# Altium PCB PCB.PcbDoc (part 1 of 2)
Units mm, origin at the board's own origin, x right, y up, seen from the top; angles counter-clockwise.
Board outline 59.56 x 122.05 mm, 4 copper layers (Top Layer, GND, POWER, Bottom Layer), stack 0.778 mm thick; 182 components, 168 nets, 567 pads, 302 vias.
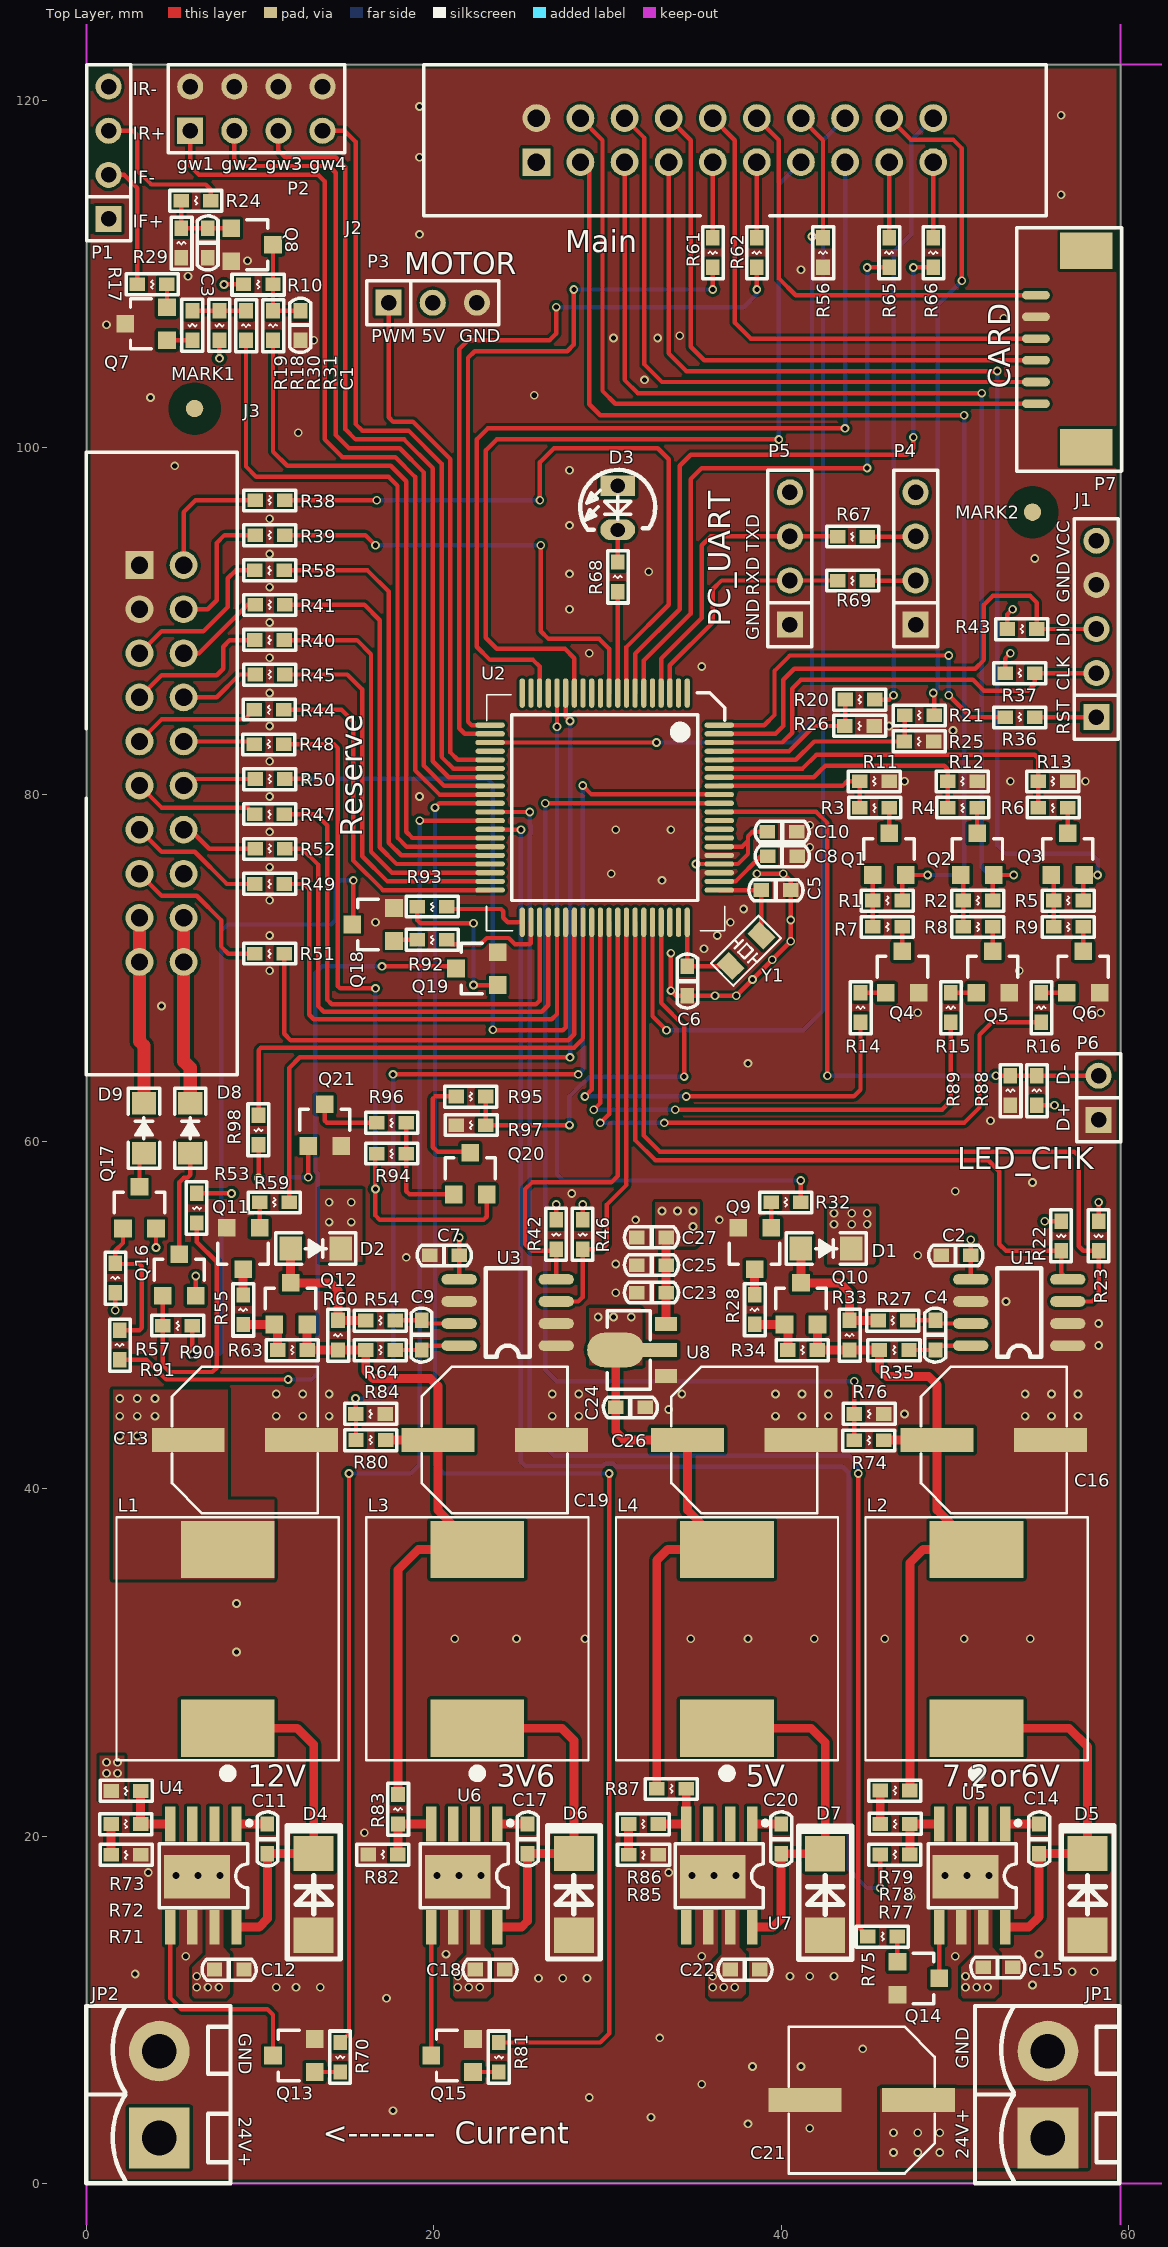
[diagram p0: Top Layer view]
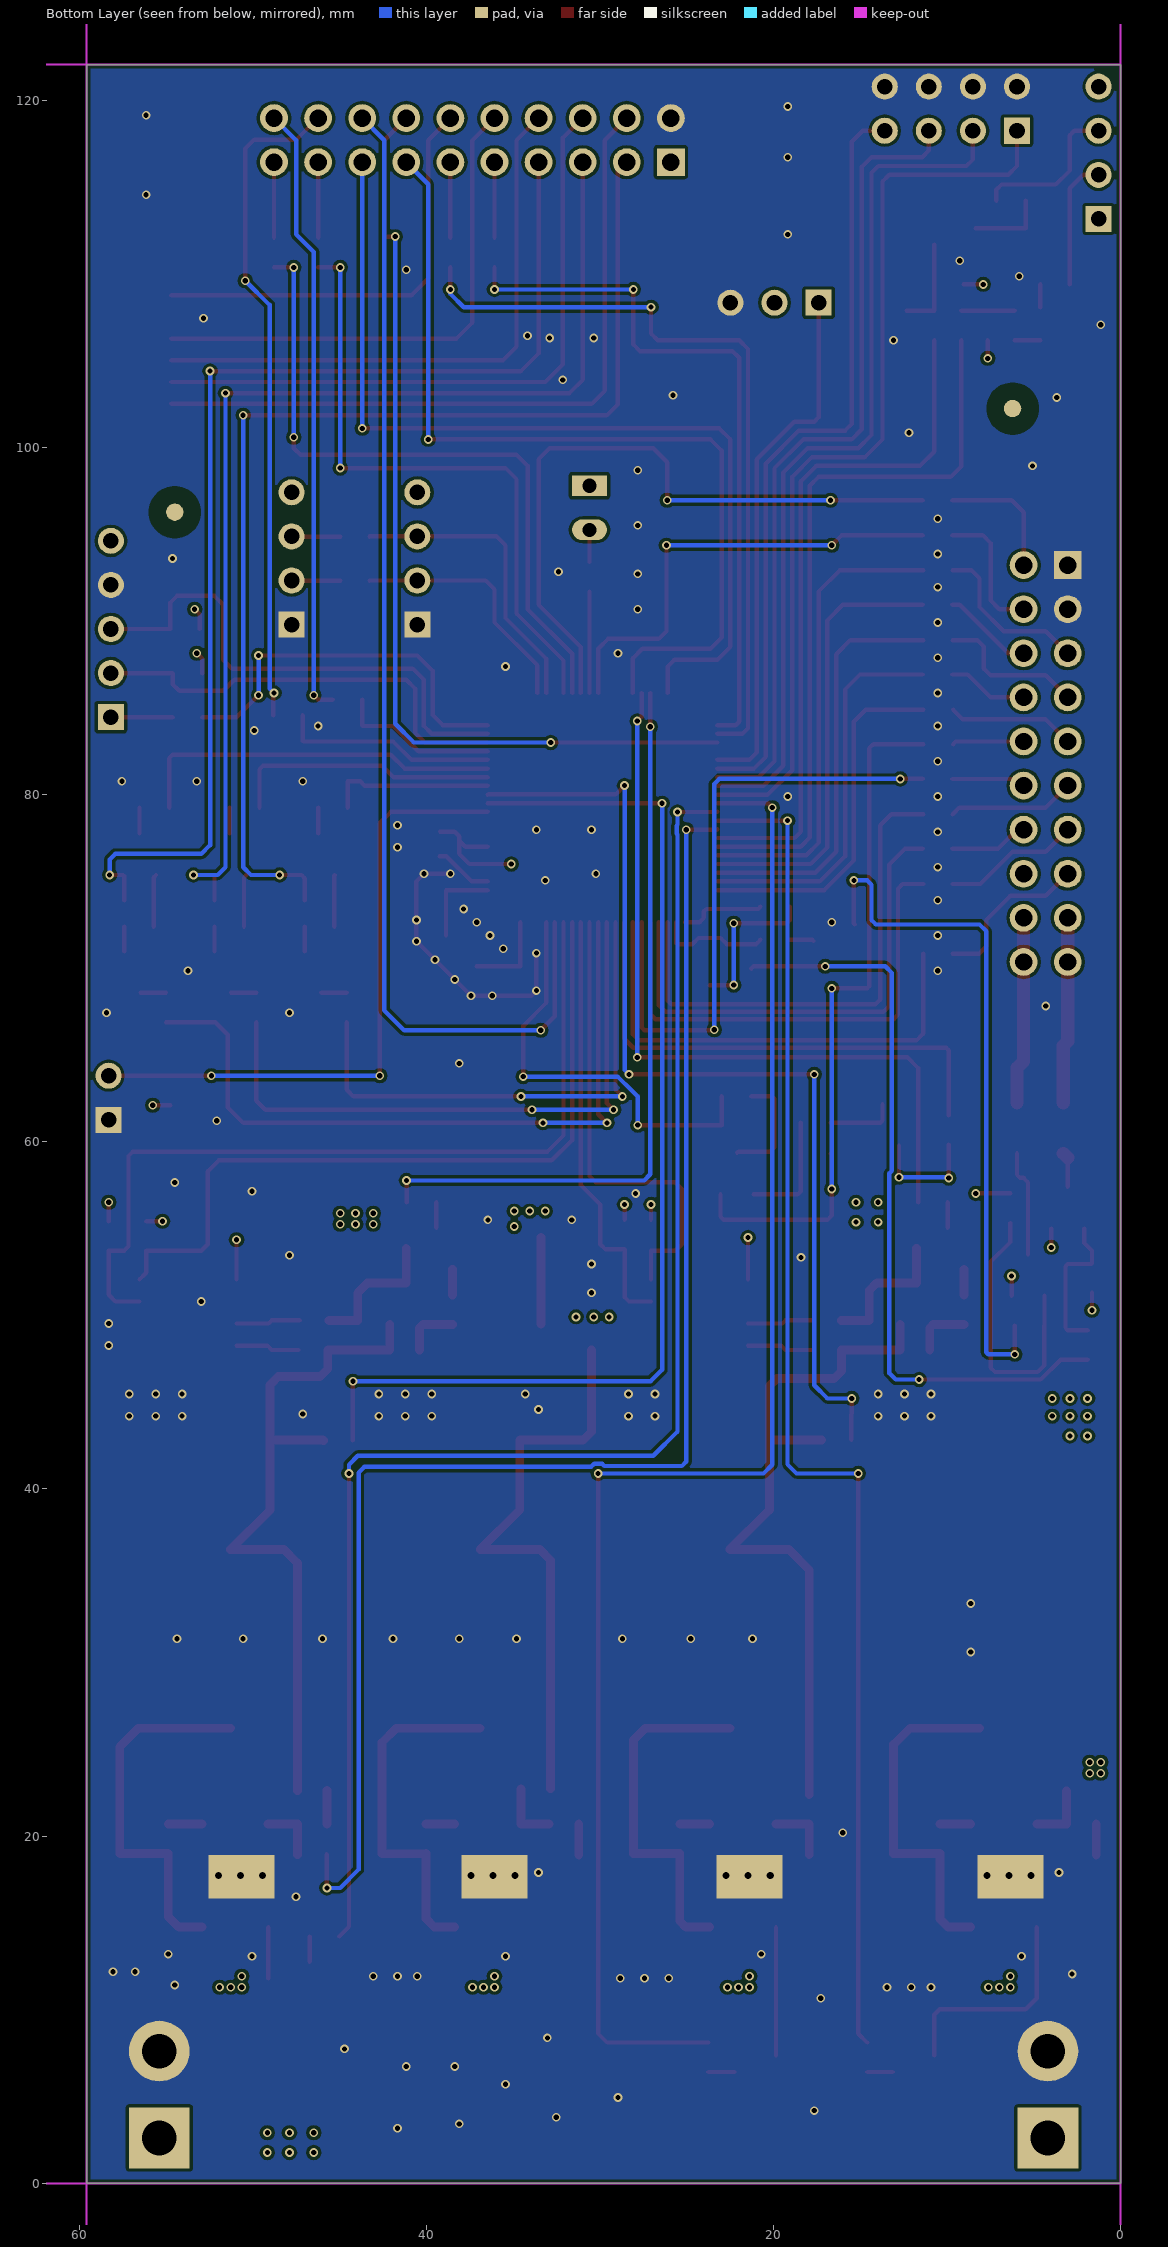
[diagram p1: Bottom Layer view, seen from below]
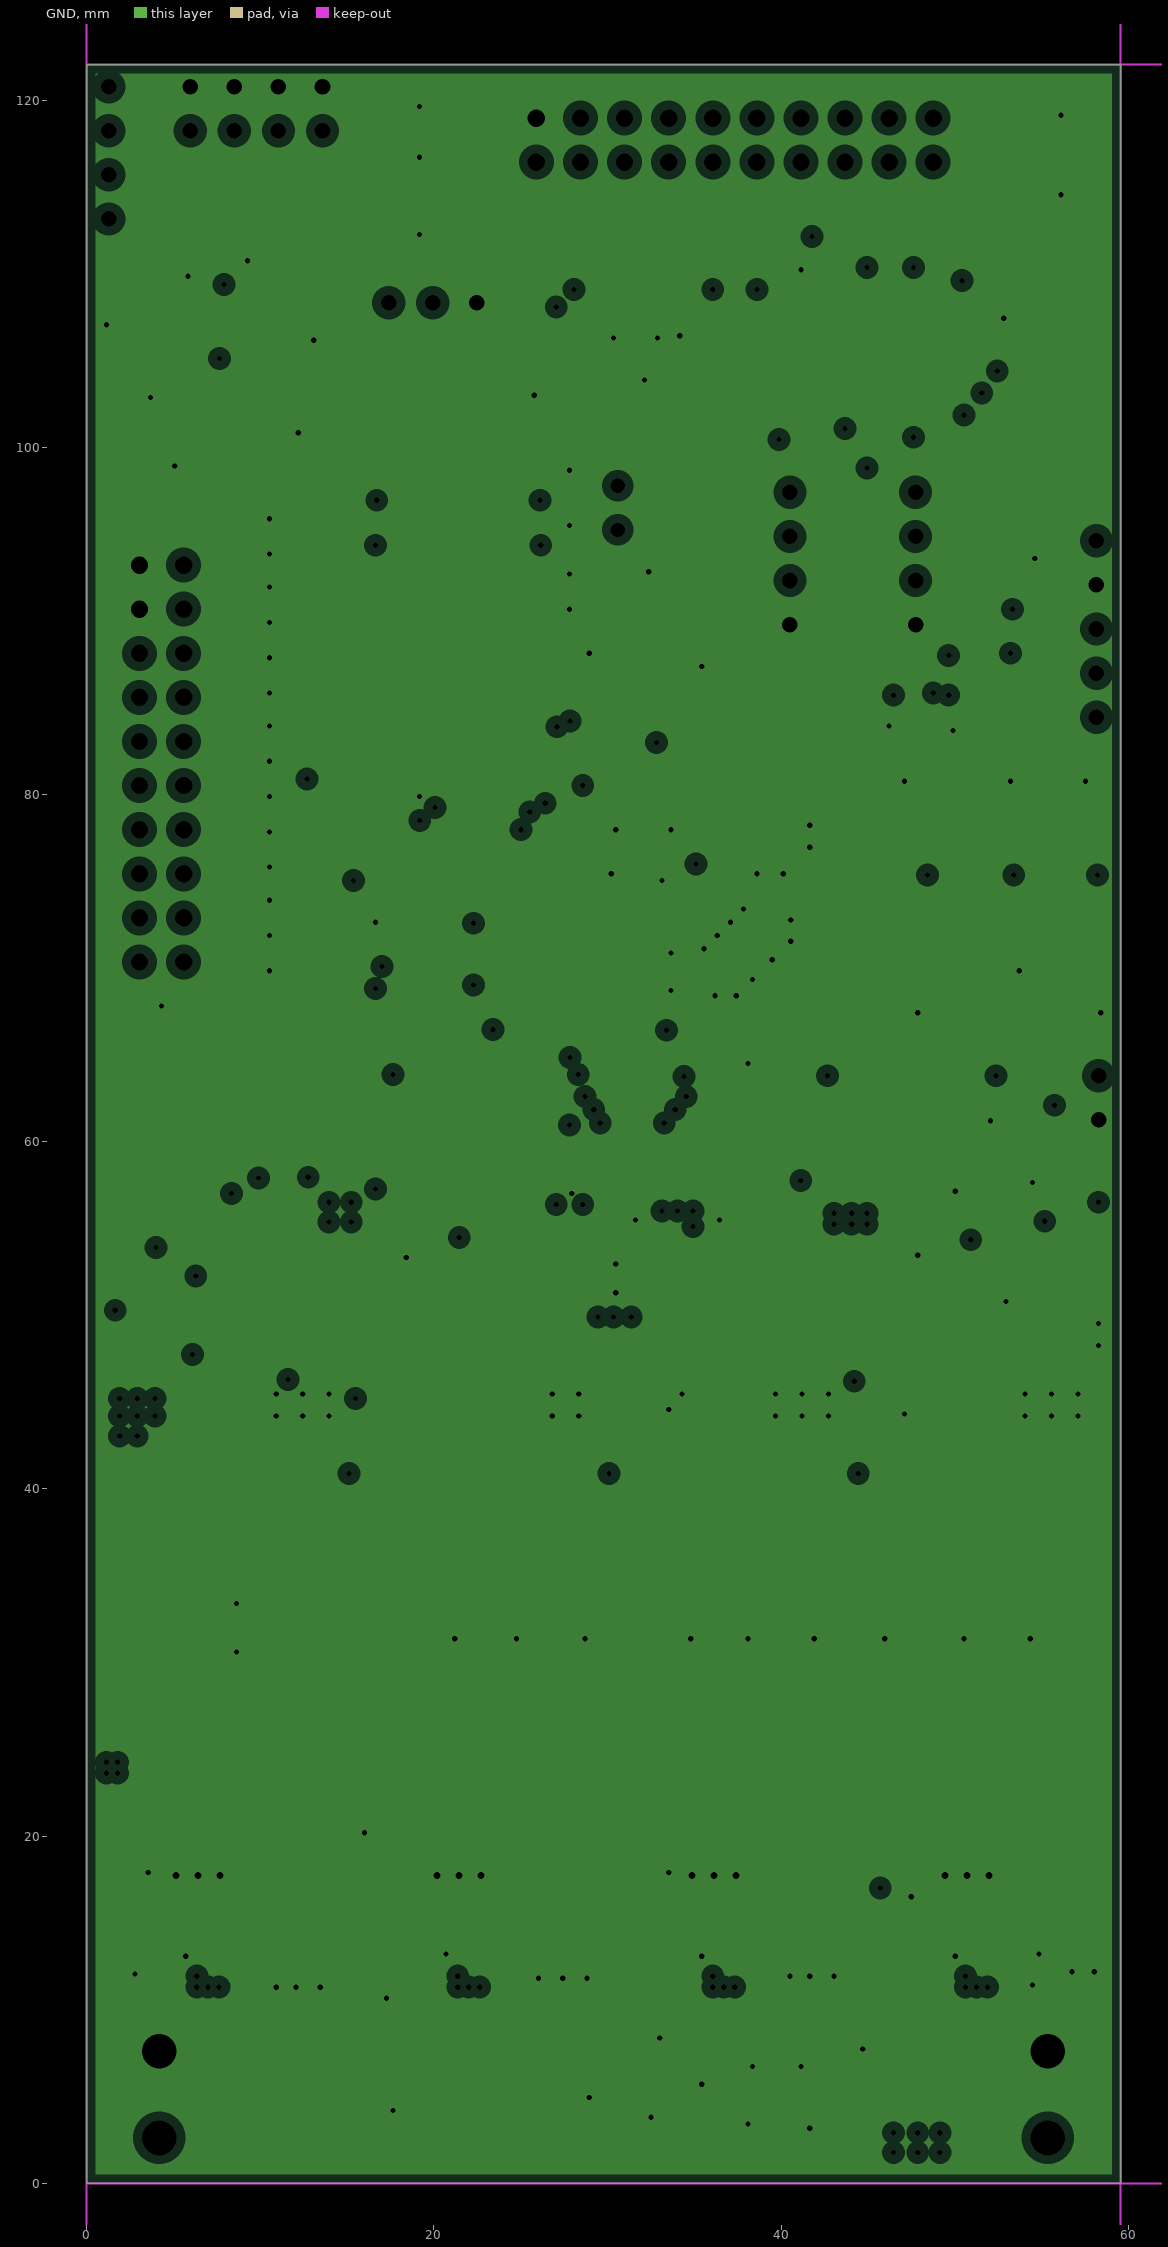
[diagram p2: GND, clearances drawn from the general rule]
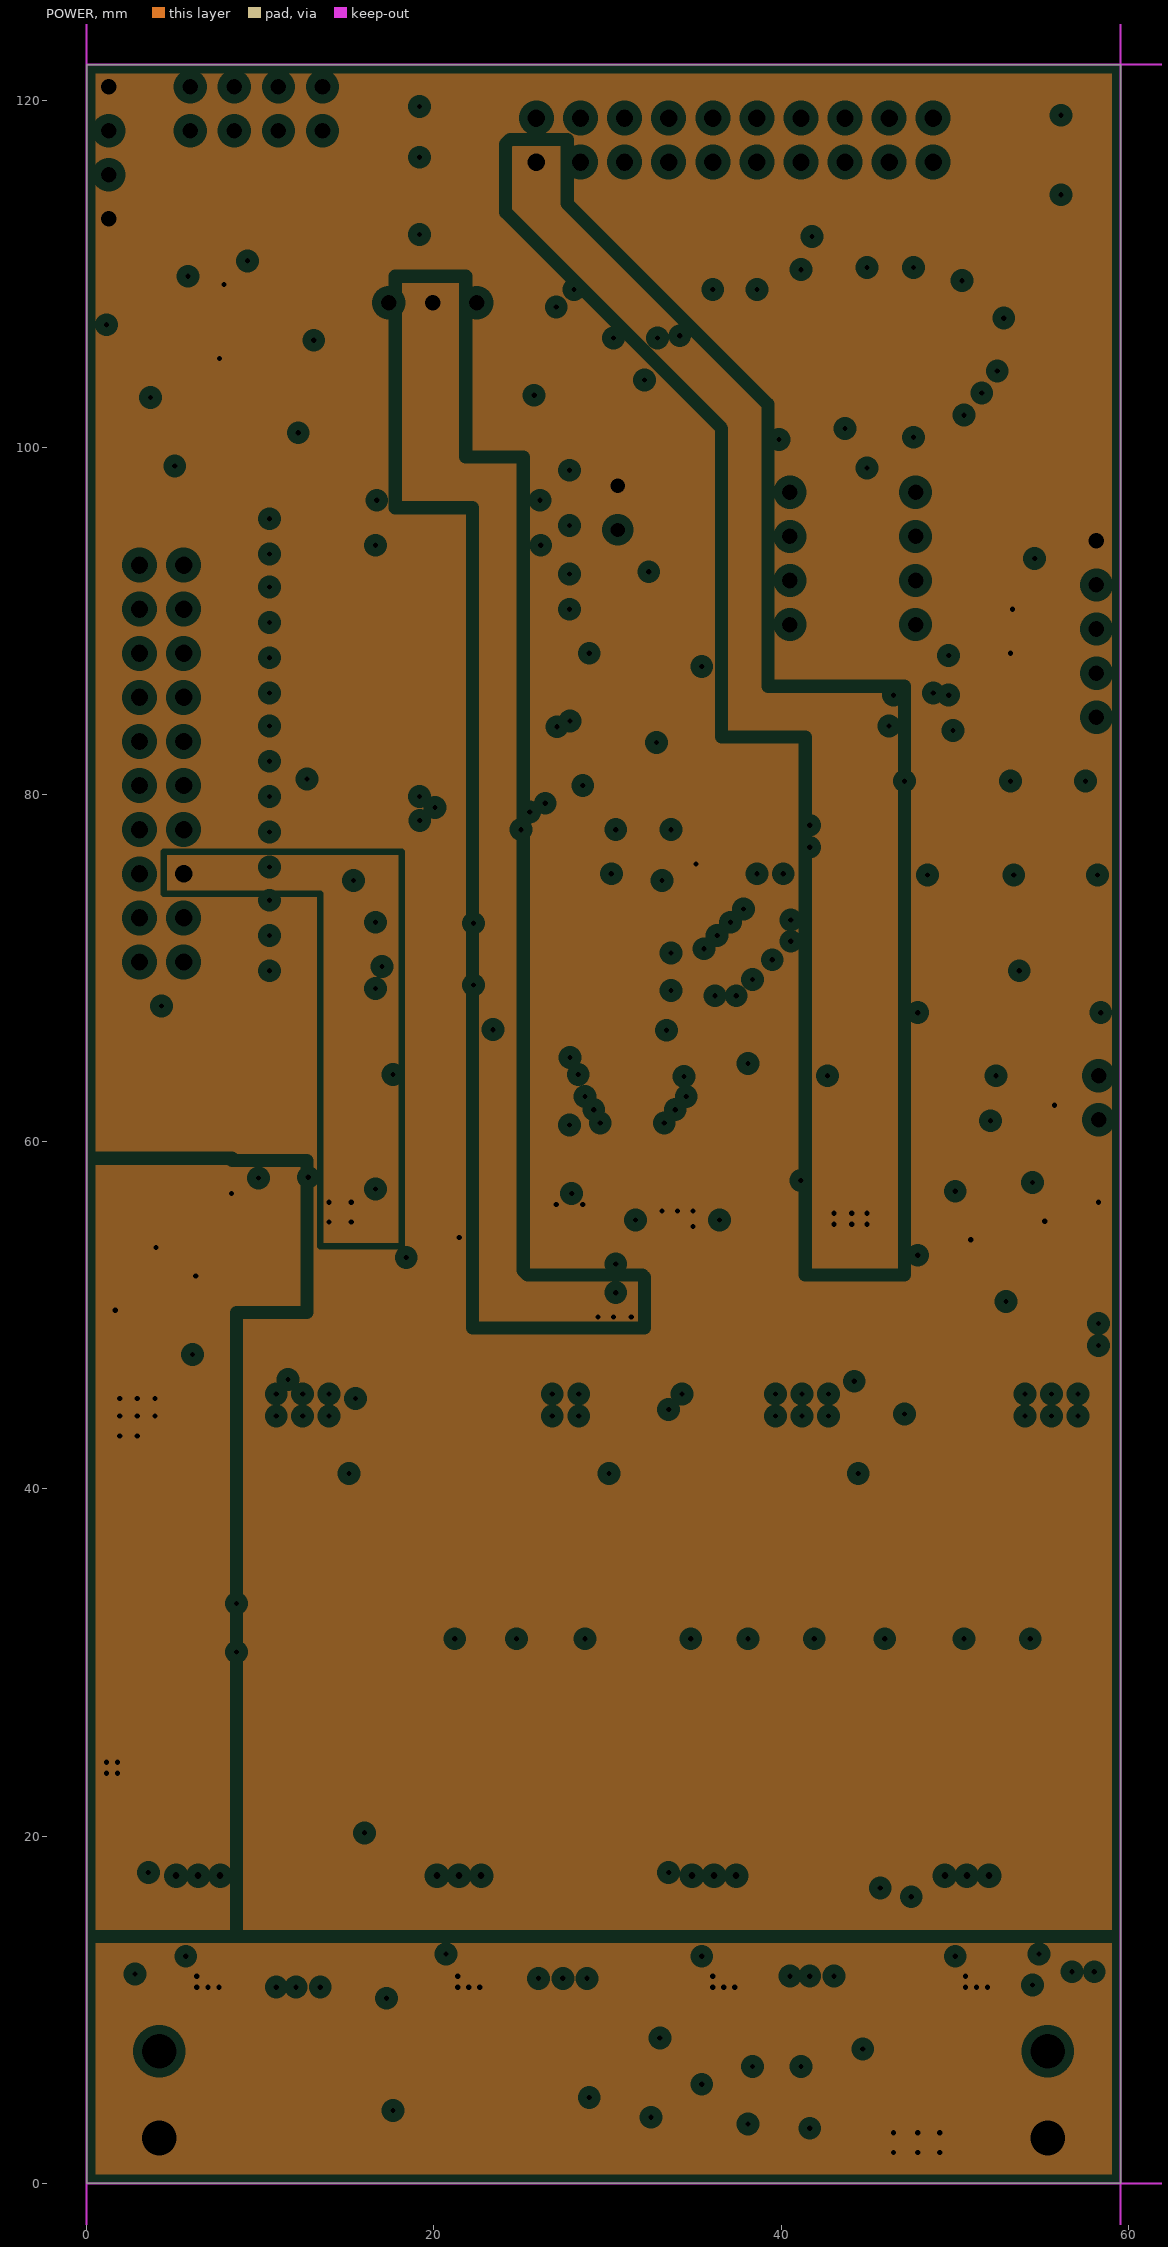
[diagram p3: POWER, clearances drawn from the general rule]

## Layer stack, top to bottom
Top Solder: solder mask 0.0102, Solder Resist, Dk 3.5
Top Layer: signal copper 0.0356
Dielectric 1: core 0.254, FR-4, Dk 4.2
GND: plane copper 0.036, net GND
Dielectric 3: prepreg 0.127, Dk 4.2
POWER: plane copper 0.036, net (Multiple Nets)
Dielectric 2: core 0.254, Dk 4.2
Bottom Layer: signal copper 0.0356
Bottom Solder: solder mask 0.0102, Solder Resist, Dk 3.5

## Board outline
0,0 59.563,0 59.563,122.047 0,122.047

## Design rules (kind name [scope] priority, off if disabled: settings)
Clearance [All] p1: gap=0.178 ignorepadtopadclearanceinfootprint=FALSE except(0: Arc-Hole Track-Hole SMDPad-Hole THPad-Hole Via-Hole Fill-Hole Poly-Hole Region-Hole Text-Hole)
MinimumSolderMaskSliver [All] p1: minsoldermaskwidth=0
PlaneClearance [All] p1: clearance=0.508
PlaneConnect [All] p1: planeconnectstyle=Direct reliefexpansion=0.508 reliefentries=4 reliefconductorwidth=0.254 reliefairgap=0.254
PolygonConnect [All] p1: connectstyle=Direct reliefconductorwidth=0.254 reliefentries=4 polygonreliefangle="90 Angle" airgapwidth=0.254
RoutingVias [All] p1: holewidth=0.711 width=1.27 viastyle="Through Hole" minholewidth=0.711 minwidth=1.27 maxholewidth=0.711 maxwidth=1.27
SilkToSilkClearance [All] p1: silktosilkclearance=0
SilkToSolderMaskClearance [IsPad] p1: minsilkscreentomaskgap=0 clearancetoexposedcopper=TRUE
SolderMaskExpansion [All] p1: expansion=0.102
Width [All] p1: maxlimit=0.762 minlimit=0.254 preferedwidth=0.254
25 further rules are at their usual default settings.

## Classes and differential pairs
component class 主控: C1 C2 C3 C4 C5 C6 C7 C8 C9 C10 D1 D2 D3 J1 J2 J3 MARK1 MARK2 P1 P2 P3 P4 P5 P6 P7 Q1 Q2 Q3 Q4 Q5 Q6 Q7 Q8 Q9 Q10 Q11 Q12 Q20 Q21 R1 R2 R3 R4 R5 R6 R7 R8 R9 R10 R11 R12 R13 R14 R15 R16 R17 R18 R19 R20 R21 R22 R23 R24 R25 R26 R27 R28 R29 R30 R31 R32 R33 R34 R35 R36 R37 R38 R39 R40 R41 R42 R43 R44 R45 R46 R47 R48 R49 R50 R51 R52 R54 R55 R56 R58 R59 R60 R61 R62 R63 R64 R65 R66 R67 R68 R69 R88 R89 R94 R95 R96 R97 R98 U1 U2 U3 Y1
component class 电源: C11 C12 C13 C14 C15 C16 C17 C18 C19 C20 C21 C22 C23 C24 C25 C26 C27 D4 D5 D6 D7 D8 D9 JP1 JP2 L1 L2 L3 L4 Q13 Q14 Q15 Q16 Q17 Q18 Q19 R53 R57 R70 R71 R72 R73 R74 R75 R76 R77 R78 R79 R80 R81 R82 R83 R84 R85 R86 R87 R90 R91 R92 R93 U4 U5 U6 U7 U8

## Components (designator, comment, footprint, x,y, rotation, side; value= is the part's Value field where it differs from the comment)
C1 "100pF/50V" CAP0603 12.319,107.861 r270 top
C2 "100nF/50V" CAP0603 49.238,53.467 r0 top
C3 "10pF/50V" CAP0603 6.985,112.609 r270 top
C4 "100nF/50V" CAP0603 48.895,49.695 r270 top
C5 "12pF/50V" CAP0603 38.874,74.498 r0 top
C6 "12pF/50V" CAP0603 34.595,68.425 r90 top
C7 "100nF/50V" CAP0603 19.774,53.467 r0 top
C8 "100nF/50V" CAP0603 39.243,76.454 r0 top
C9 "100nF/50V" CAP0603 19.304,49.695 r270 top
C10 "100nF/50V" CAP0603 40.894,77.851 r180 top
C11 "10N/50V" CAP0603 10.414,19.012 r90 top
C12 "100N/50V" CAP0603 7.378,12.319 r0 top
C13 "220uF/25V" "220uF 25V" 9.326,42.799 r0 top
C14 "10nF/50V" CAP0603 54.864,19.012 r90 top
C15 "100nF/50V" CAP0603 51.659,12.446 r0 top
C16 "220uF/25V" "220uF 25V" 52.464,42.799 r0 top
C17 "10N/50V" CAP0603 25.4,19.012 r90 top
C18 "100N/50V" CAP0603 22.407,12.319 r0 top
C19 "220uF/25V" "220uF 25V" 23.705,42.799 r0 top
C20 "10N/50V" CAP0603 40.005,19.012 r90 top
C21 "220uF/25V" "220uF 25V" 44.45,4.826 r180 top
C22 "100N/50V" CAP0603 37.096,12.319 r0 top
C23 "10uF/10V" CAP0603 33.368,51.308 r180 top
C24 "100nF/50V" CAP0603 30.492,44.704 r0 top
C25 "100N/50V" CAP0603 33.368,52.895 r180 top
C26 "220uF/25V" "220uF 25V" 38.084,42.799 r0 top
C27 "22pF/50V" CAP0603 33.368,54.483 r180 top
D1 "DSK14" SOD-123FL 41.074,53.848 r0 top
D2 "DSK14" SOD-123FL 11.676,53.848 r0 top
D3 "LED_T3R" LED2_300 30.595,97.79 r0 top
D4 "B340A-SMA" DO-214AC 13.081,16.65 r90 top
D5 "B340" DO-214AC 57.658,16.65 r90 top
D6 "B340A-SMA" DO-214AC 28.067,16.65 r90 top
D7 "B340A-SMA" DO-214AC 42.545,16.637 r90 top
D8 "DSK36" SOD-123FL 5.969,59.256 r90 top
D9 "DSK36" SOD-123FL 3.302,59.256 r90 top
J1 "PIN254_1*5*WXHJ" PIN254_1*5*1100S 58.166,84.455 r90 top
J2 "20Pin" "DC254_2*10 - duplicate" 37.338,117.697 r90 top
J3 "20Pin" "DC254_2*10 - duplicate" 4.318,81.788 r0 top
JP1 "KF129_508_2" KF129_508_2 55.372,2.62 r90 top
JP2 "KF129_508_2" KF129_508_2 4.191,2.62 r90 top
L1 "LQS1260M2200_47uH" LQS1212 8.128,31.369 r90 top
L2 "LQS1260M2200_47uH" LQS1212 51.266,31.369 r90 top
L3 "LQS1260M2200_47uH" LQS1212 22.507,31.369 r90 top
L4 "LQS1260M2200_47uH" LQS1212 36.886,31.369 r90 top
MARK1 "MARK" MARK 6.223,102.235 r90 top
MARK2 "MARK" MARK 54.483,96.266 r90 top
P1 "PIN254_1*4*WXHJ" PIN254_1*4*1100S 1.27,113.157 r90 top
P2 "Header 4X2" HDR2X4 5.969,118.237 r0 top
P3 "PIN254_1*3*WXHJ" PIN254_1*3*1100S 17.399,108.331 r0 top
P4 "PIN254_1*4*WXHJ" PIN254_1*4*1100S 47.752,89.789 r90 top
P5 "PIN254_1*4*WXHJ" PIN254_1*4*1100S 40.513,89.789 r90 top
P6 "PIN254_1*2*WXHJ" PIN254_1*2*1100S 58.293,61.265 r90 top
P7 "1.25-6AWR" SMT-1.25-6 56.134,105.664 r90 top
Q1 "PNPS-9012" SOT-23 46.228,76.568 r0 top
Q2 "PNPS-9012" SOT-23 51.308,76.568 r0 top
Q3 "PNPS-9012" SOT-23 56.515,76.568 r0 top
Q4 "NPNS-9013" SOT-23 46.99,69.78 r0 top
Q5 "NPNS-9013" SOT-23 52.197,69.78 r0 top
Q6 "NPNS-9013" SOT-23 57.404,69.78 r0 top
Q7 "PNPS-9012" SOT-23 3.429,107.122 r90 top
Q8 "NPNS-9013" SOT-23 9.538,111.671 r270 top
Q9 "NPNS-9013" SOT-23 38.481,53.848 r180 top
Q10 "RZR040P01TL" SOT-23 41.148,50.673 r0 top
Q11 "NPNS-9013" SOT-23 9.017,53.848 r180 top
Q12 "RZR040P01TL" SOT-23 11.75,50.673 r0 top
Q13 "NPNS-9013" SOT-23 11.938,7.366 r90 top
Q14 "NPNS-9013" SOT-23 47.907,11.811 r270 top
Q15 "NPNS-9013" SOT-23 21.054,7.366 r90 top
Q16 "UT3401ZG" SOT-23 5.334,52.324 r0 top
Q17 "UT3401ZG" SOT-23 3.048,56.204 r0 top
Q18 "NPNS-9013" SOT-23 16.51,72.517 r90 top
Q19 "NPNS-9013" SOT-23 22.479,69.977 r90 top
Q20 "PNPS-9012" SOT-23 22.098,58.166 r0 top
Q21 "NPNS-9013" SOT-23 13.716,60.96 r0 top
R1 "100K 5%" RES0603 45.288,73.901 r0 top
R2 "100K 5%" RES0603 50.495,73.901 r0 top
R3 "100K 5%" RES0603 46.228,79.235 r180 top
R4 "100K 5%" RES0603 51.308,79.235 r180 top
R5 "100K 5%" RES0603 55.702,73.901 r0 top
R6 "100K 5%" RES0603 56.515,79.235 r180 top
R7 "10K 1%" RES0603 45.288,72.377 r0 top
R8 "10K 1%" RES0603 50.495,72.377 r0 top
R9 "10K 1%" RES0603 55.702,72.377 r0 top
R10 "20K 5%" RES0603 9.036,109.385 r0 top
R11 "10K 5%" RES0603 44.526,80.759 r0 top
R12 "10K 5%" RES0603 49.606,80.759 r0 top
R13 "10K 5%" RES0603 54.813,80.759 r0 top
R14 "1K 5%" RES0603 44.577,66.878 r90 top
R15 "1K 5%" RES0603 49.784,66.878 r90 top
R16 "1K 5%" RES0603 54.991,66.878 r90 top
R17 "100R 5%" RES0603 4.629,109.385 r180 top
R18 "20K 5%" RES0603 7.652,107.874 r270 top
R19 "3K 5%" RES0603 6.096,107.874 r270 top
R20 "100K 5%" RES0603 43.688,85.471 r0 top
R21 "100K 5%" RES0603 47.117,84.565 r0 top
R22 "10K 5%" RES0603 56.134,55.423 r270 top
R23 "10K 5%" RES0603 58.293,55.423 r270 top
R24 "20K 5%" RES0603 5.461,114.211 r0 top
R25 "10K 5%" RES0603 48.793,83.058 r180 top
R26 "10K 5%" RES0603 45.364,83.947 r180 top
R27 "10R 5%" RES0603 45.593,49.708 r0 top
R28 "200K 5%" RES0603 38.481,49.479 r90 top
R29 "47K 5%" RES0603 5.461,110.92 r90 top
R30 "0R 5%" RES0603 9.182,106.172 r90 top
R31 "0R 5%" RES0603 10.738,106.172 r90 top
R32 "1K 5%" RES0603 39.431,56.515 r0 top
R33 "10R 5%" RES0603 43.942,48.006 r90 top
R34 "2M 5%" RES0603 40.396,48.006 r0 top
R35 "10R 5%" RES0603 45.669,48.006 r0 top
R36 "100R 5%" RES0603 52.908,84.455 r0 top
R37 "10K 5%" RES0603 52.908,86.995 r0 top
R38 "0R 5%" RES0603 9.703,96.952 r0 top
R39 "0R 5%" RES0603 9.703,94.945 r0 top
R40 "0R 5%" RES0603 11.379,88.898 r180 top
R41 "0R 5%" RES0603 9.703,90.931 r0 top
R42 "10K 5%" RES0603 27.051,55.499 r270 top
R43 "10K 5%" RES0603 53.035,89.535 r0 top
R44 "0R 5%" RES0603 11.354,84.884 r180 top
R45 "0R 5%" RES0603 9.703,86.916 r0 top
R46 "10K 5%" RES0603 28.575,55.499 r270 top
R47 "0R 5%" RES0603 11.379,78.863 r180 top
R48 "0R 5%" RES0603 9.652,82.902 r0 top
R49 "0R 5%" RES0603 11.379,74.849 r180 top
R50 "0R 5%" RES0603 9.703,80.895 r0 top
R51 "0R 5%" RES0603 11.379,70.835 r180 top
R52 "0R 5%" RES0603 9.703,76.881 r0 top
R53 "2M 5%" RES0603 6.35,57.023 r270 top
R54 "10R 5%" RES0603 16.078,49.708 r0 top
R55 "200K 5%" RES0603 9.017,49.473 r90 top
R56 "10K 5%" RES0603 42.418,110.363 r90 top
R57 "2M 5%" RES0603 1.651,51.308 r90 top
R58 "0R 5%" RES0603 11.379,92.912 r180 top
R59 "1K 5%" RES0603 9.967,56.515 r0 top
R60 "10R 5%" RES0603 14.478,48.006 r90 top
R61 "0R 5%" RES0603 36.068,110.363 r90 top
R62 "0R 5%" RES0603 38.608,110.363 r90 top
R63 "2M 5%" RES0603 10.998,48.006 r0 top
R64 "10R 5%" RES0603 16.078,48.006 r0 top
R65 "0R 5%" RES0603 46.228,110.363 r90 top
R66 "0R 5%" RES0603 48.768,110.363 r90 top
R67 "22R 5%" RES0603 44.958,94.856 r180 top
R68 "1K 5%" RES0603 30.595,91.694 r90 top
R69 "22R 5%" RES0603 44.958,92.316 r180 top
R70 "1K 5%" RES0603 14.605,8.118 r270 top
R71 "1K 5%" RES0603 3.111,18.923 r180 top
R72 "10K 5%" RES0603 1.409,20.701 r0 top
R73 "100K 5%" RES0603 3.111,22.606 r180 top
R74 "100K 5%" RES0603 44.221,42.799 r0 top
R75 "1K 5%" RES0603 45.005,14.224 r0 top
R76 "10K 5%" RES0603 45.923,44.323 r180 top
R77 "5.1K 5%" RES0603 45.72,18.948 r0 top
R78 "25K 1%" RES0603 47.422,20.701 r180 top
R79 "1.5K 5%" RES0603 45.72,22.631 r0 top
R80 "100K 5%" RES0603 15.519,42.824 r0 top
R81 "1K 5%" RES0603 23.749,8.118 r270 top
R82 "4.7K 5%" RES0603 16.231,18.948 r0 top
R83 "10K 5%" RES0603 17.932,20.701 r90 top
R84 "10K 5%" RES0603 17.196,44.323 r180 top
R85 "20K 5%" RES0603 32.918,18.923 r180 top
R86 "10K 5%" RES0603 31.217,20.701 r0 top
R87 "100K 5%" RES0603 32.842,22.733 r0 top
R88 "100K 5%" RES0603 54.737,62.103 r90 top
R89 "10K 5%" RES0603 53.213,62.103 r90 top
R90 "200K 5%" RES0603 6.096,49.403 r180 top
R91 "200K 5%" RES0603 1.905,47.447 r90 top
R92 "1K 5%" RES0603 20.752,71.628 r180 top
R93 "1K 5%" RES0603 20.752,73.533 r180 top
R94 "100K 5%" RES0603 18.415,59.309 r180 top
R95 "100K 5%" RES0603 21.285,62.611 r0 top
R96 "10K 1%" RES0603 18.415,61.087 r180 top
R97 "10K 5%" RES0603 22.987,60.96 r180 top
R98 "1K 5%" RES0603 9.906,61.519 r270 top
U1 "INA219" SO-8 56.515,48.26 r180 top
U2 "FM33LG048" LQFP80 29.845,79.248 r270 top
U3 "INA219" SO-8 27.051,48.26 r180 top
U4 "TPS5430DDA" SOP-8-P 8.636,20.701 r270 top
U5 "TPS5430DDA" SOP-8-P 52.917,20.701 r270 top
U6 "TPS5430DDA" SOP-8-P 23.664,20.701 r270 top
U7 "TPS5430DDA" SOP-8-P 38.354,20.701 r270 top
U8 "CE6232A33P" SOT-89 32.48,48.006 r90 top
Y1 "32.768kD" SMD-3215_2P 38.862,71.882 r225 top

## Footprints (in the part's own frame and the unit in brackets; to place one, negate y for a bottom-side part, rotate by r counter-clockwise, add the part's x,y. Pads: shape width x height; smd on the part's side, far side on the other; paste and mask are expansions set on the pad)
"220uF 25V" [mm]
  rect 4.2x1.4 smd: 1(-3.47,0.025) 2(3.064,0.025)
  silkscreen extent -4.4,-4.2 4,4.25
CAP0603 [mil]
  rect 35x31 smd: 1(-0.49,0) 2(66.51,0)
  silkscreen extent -29,-24 94,23, body extent 1,-15 72,15, height 20
"DC254_2*10 - duplicate" [mm]
  rect 1.6x1.6 hole 1: 1(-1.27,11.43)
  round 1.6 hole 1: 2(1.27,11.43) 3(-1.27,8.89) 4(1.27,8.89) 5(-1.27,6.35) 6(1.27,6.35) 7(-1.27,3.81) 8(1.27,3.81) 9(-1.27,1.27) 10(1.27,1.27) 11(-1.27,-1.27) 12(1.27,-1.27) 13(-1.27,-3.81) 14(1.27,-3.81) 15(-1.27,-6.35) 16(1.27,-6.35) 17(-1.27,-8.89) 18(1.27,-8.89) 19(-1.27,-11.43) 20(1.27,-11.43)
  silkscreen extent -4.35,-17.93 4.35,17.93
DO-214AC [mil]
  rect 80x90.55 smd: 1(-92.5,0) 2(92.5,0)
  silkscreen extent -146,-60 156,60, body extent -91,-53 90,53, height 94
HDR2X4 [mm] "Connector; Header; 4x2 Position"
  rect 1.5x1.5 hole 0.9: 1(0,0)
  round 1.5 hole 0.9: 2(0,2.54) 3(2.54,0) 4(2.54,2.54) 5(5.08,0) 6(5.08,2.54) 7(7.62,0) 8(7.62,2.54)
  silkscreen extent -1.27,-1.27 8.89,3.81
KF129_508_2 [mm]
  rect 3.5x3.5 hole 2: 1(0,0)
  round 3.5 hole 2: 2(5,0)
  silkscreen extent -2.6,-4.1 7.6,4.2
LED2_300 [mm]
  rect 2x1.2 hole 0.813: 1(0,0)
  oval 2x1.2 hole 0.813: 2(0,-2.54)
  silkscreen extent -2.16,-2.53 2.16,0.91, body extent -1.65,-2.91 1.64,0.39, height 5.51
LQFP80 [mm]
  oval 1.7x0.3 smd: 1(-6.6,4.75) 2(-6.6,4.25) 3(-6.6,3.75) 4(-6.6,3.25) 5(-6.6,2.75) 6(-6.6,2.25) 7(-6.6,1.75) 8(-6.6,1.25) 9(-6.6,0.75) 10(-6.6,0.25) 11(-6.6,-0.25) 12(-6.6,-0.75) 13(-6.6,-1.25) 14(-6.6,-1.75) 15(-6.6,-2.25) 16(-6.6,-2.75) 17(-6.6,-3.25) 18(-6.6,-3.75) 19(-6.6,-4.25) 20(-6.6,-4.75) 41(6.6,-4.75) 42(6.6,-4.25) 43(6.6,-3.75) 44(6.6,-3.25) 45(6.6,-2.75) 46(6.6,-2.25) 47(6.6,-1.75) 48(6.6,-1.25) 49(6.6,-0.75) 50(6.6,-0.25) 51(6.6,0.25) 52(6.6,0.75) 53(6.6,1.25) 54(6.6,1.75) 55(6.6,2.25) 56(6.6,2.75) 57(6.6,3.25) 58(6.6,3.75) 59(6.6,4.25) 60(6.6,4.75)
  oval 0.3x1.7 smd: 21(-4.75,-6.6) 22(-4.25,-6.6) 23(-3.75,-6.6) 24(-3.25,-6.6) 25(-2.75,-6.6) 26(-2.25,-6.6) 27(-1.75,-6.6) 28(-1.25,-6.6) 29(-0.75,-6.6) 30(-0.25,-6.6) 31(0.25,-6.6) 32(0.75,-6.6) 33(1.25,-6.6) 34(1.75,-6.6) 35(2.25,-6.6) 36(2.75,-6.6) 37(3.25,-6.6) 38(3.75,-6.6) 39(4.25,-6.6) 40(4.75,-6.6) 61(4.75,6.6) 62(4.25,6.6) 63(3.75,6.6) 64(3.25,6.6) 65(2.75,6.6) 66(2.25,6.6) 67(1.75,6.6) 68(1.25,6.6) 69(0.75,6.6) 70(0.25,6.6) 71(-0.25,6.6) 72(-0.75,6.6) 73(-1.25,6.6) 74(-1.75,6.6) 75(-2.25,6.6) 76(-2.75,6.6) 77(-3.25,6.6) 78(-3.75,6.6) 79(-4.25,6.6) 80(-4.75,6.6)
  silkscreen extent -6.62,-6.81 7.1,6.91, body extent -5.33,-5.33 5.36,5.33, height 2
LQS1212 [mm]
  rect 3.3x5.4 smd: 1(-5.15,0) 2(5.15,0)
  silkscreen extent -8,-6.4 7,6.4, body extent -6.35,-6.1 6.35,6.1, height 6
MARK [mm]
  round 1 smd: 0(0,0)
  round 1 smd far side: 1(0,0)
  Top Layer pour cut-out: -1.5,0 -1.5,-0.148 -1.442,-0.438 -1.329,-0.711 -1.165,-0.956 -0.956,-1.165 -0.711,-1.329 -0.438,-1.442 -0.148,-1.5 0,-1.5 0.148,-1.5 0.438,-1.442 0.711,-1.329 0.956,-1.165 1.165,-0.956 1.329,-0.711 1.442,-0.438 1.5,-0.148 1.5,0 1.5,0.148 1.442,0.438 1.329,0.711 1.165,0.956 0.956,1.165 0.711,1.329 0.438,1.442 0.148,1.5 0,1.5 -0.148,1.5 -0.438,1.442 -0.711,1.329 -0.956,1.165 -1.165,0.956 -1.329,0.711 -1.442,0.438 -1.5,0.148 -1.5,0
  Bottom Layer pour cut-out: -1.5,0 -1.5,-0.148 -1.442,-0.438 -1.329,-0.711 -1.165,-0.956 -0.956,-1.165 -0.711,-1.329 -0.438,-1.442 -0.148,-1.5 0,-1.5 0.148,-1.5 0.438,-1.442 0.711,-1.329 0.956,-1.165 1.165,-0.956 1.329,-0.711 1.442,-0.438 1.5,-0.148 1.5,0 1.5,0.148 1.442,0.438 1.329,0.711 1.165,0.956 0.956,1.165 0.711,1.329 0.438,1.442 0.148,1.5 0,1.5 -0.148,1.5 -0.438,1.442 -0.711,1.329 -0.956,1.165 -1.165,0.956 -1.329,0.711 -1.442,0.438 -1.5,0.148 -1.5,0
PIN254_1*2*1100S [mm] "Connector; Header; 4 Position"
  rect 1.5x1.5 hole 0.9: 1(0,0)
  round 1.5 hole 0.9: 2(2.54,0)
  silkscreen extent -1.27,-1.27 3.81,1.27
PIN254_1*3*1100S [mm] "Connector; Header; 4 Position"
  rect 1.5x1.5 hole 0.9: 1(0,0)
  round 1.5 hole 0.9: 2(2.54,0) 3(5.08,0)
  silkscreen extent -1.27,-1.27 6.35,1.27
PIN254_1*4*1100S [mm] "Connector; Header; 4 Position"
  rect 1.5x1.5 hole 0.9: 1(0,0)
  round 1.5 hole 0.9: 2(2.54,0) 3(5.08,0) 4(7.62,0)
  silkscreen extent -1.27,-1.27 8.89,1.27, body extent -1.3,-1.3 8.86,1.24, height 8.54
PIN254_1*5*1100S [mm]
  rect 1.5x1.5 hole 0.9: 1(0,0)
  round 1.5 hole 0.9: 2(2.54,0) 3(5.08,0) 4(7.62,0) 5(10.16,0)
  silkscreen extent -1.27,-1.27 11.43,1.27
RES0603 [mil]
  rect 35x31 smd: 1(0,0) 2(67,0)
  silkscreen extent -26,-24 92,23, body extent 0,-15 71,15, height 12
SMD-3215_2P [mm]
  rect 1x1.3 smd: 1(0,0) 2(2.5,0)
  silkscreen extent -0.69,-0.91 3.19,0.91, body extent -0.3,-0.99 2.9,0.99, height 0.7
SMT-1.25-6 [mm]
  oval 0.5x1.6 smd: 1(-3.15,1.45) 2(-1.9,1.45) 3(-0.65,1.45) 4(0.6,1.45) 5(1.85,1.45) 6(3.1,1.45)
  rect 2.1x3 smd: 7(-5.65,-1.45) 8(5.65,-1.45)
  silkscreen extent -7.05,-3.5 7,2.55
SO-8 [mil]
  oval 80x24 smd: 1(0,0) 2(0,-50) 3(0,-100) 4(0,-150) 5(220,-150) 6(220,-100) 7(220,-50) 8(220,0)
  silkscreen extent 60,-175 160,25, body extent -7,-171 229,21, height 67
SOD-123FL [mm]
  rect 1.3x1.4 smd: 1(0.074,0) 2(2.974,0)
  silkscreen extent -0.78,-0.9 3.82,0.9, body extent -0.28,-0.82 3.32,0.82, height 0.95
SOP-8-P [mm]
  rect 2x0.6 smd: 1(0,0) 2(0,-1.27) 3(0,-2.54) 4(0,-3.81) 5(5.94,-3.81) 6(5.94,-2.54) 7(5.94,-1.27) 8(5.94,0)
  rect 2.5x3.8 smd: 9(3.048,-2.286)
  rect 2.5x3.8 smd far side: 9(3.048,-2.286)
  silkscreen extent -0.18,-4.44 4.83,0.86, body extent 0.38,-4.57 5.72,0.76, height 1.8
SOT-23 [mil]
  rect 40x40 smd: 1(-37.4,-47.24) 2(37.4,-47.24) 3(0,47.24)
  silkscreen extent -57,-12 57,35, body extent -57,-55 57,55, height 47
SOT-89 [mm]
  rect 0.8x1.27 smd: 1(-1.5,-0.9) 3(1.5,-0.9)
  oval 2x3.3 smd: 2(0,2)
  rect 0.8x2.54 smd: 2(0,-0.265)
  silkscreen extent -2.25,0 2.25,2.5, body extent -2.25,-1.02 2.25,2.92, height 1.4

## Part data
C1: library part 101020103-0010, "101pf,50 V,±5%,0603,国巨,CC0603JRNP09BN101", Part Name=0603贴片电容, ID=4, Part Number=101020103-0010, SMD/DIP=SMD
C2 C4 C7 C8 C9 C10 C15 C24: library part 101020103-0021, "104pF,50 V,±10%,0603,国巨,CC0603KRX7R9BB104", Part Name=0603贴片电容, ID=3, Part Number=101020103-0021, SMD/DIP=SMD
C3: library part 101020103-0014, "10pF,50 V,±5%,0603,X7R,国巨,CC0603JRNPO9BN100", Part Name=0603贴片电容, ID=7, Part Number=101020103-0014, SMD/DIP=SMD
C5 C6: library part 101020103-0005, "12P,50 V,±5%,0603,国巨,CC0603JRNPO9BN12", Part Name=0603贴片电容, ID=11, Part Number=101020103-0005, SMD/DIP=SMD
C11 C17 C20: library part 101020103-0007, "10N/50V，±10%，0603", Part Name=0603贴片电容, ID=35, Part Number=101020103-0007
C12 C18 C22 C25: library part 101020103-0021, "100N/50V，±10%，0603", Part Name=0603贴片电容, ID=34, Part Number=101020103-0021
C13 C16 C19 C21 C26: "220UF,25 V,±20%,8*10mm,立隆电子工业股份有限公司,VEJ221M1ETR-0810", 料号=1010203-0037
C14: library part 101020103-0007, "10nF,50 V,±10%,0603,X7R,国巨,CC0603KRX7R9BB103", Part Name=0603贴片电容, ID=6, Part Number=101020103-0007, SMD/DIP=SMD
C23: library part 101020103-0026, "106pF,10 V,±10%,0603,村田,GRM188R61A106KE47D", Part Name=0603贴片电容, ID=8, Part Number=101020103-0026, SMD/DIP=SMD
C27: library part 101020103-0009, "22pF,50 V,±5%,0603,国巨,CC0603JRNPO9BN22", Part Name=0603贴片电容, ID=16, Part Number=101020103-0009, SMD/DIP=SMD
D1 D2 D8 D9: library part 101040101-0043, "DSK14,SOD-123FL,1 A,40 V,28 V,台湾强茂集团苏州群鑫电子,DSK14", Part Name=二极管, ID=10, Part Number=101040101-0043, SMD/DIP=SMD
D3: library part 101040102-0001, "圆形插件,3mm 圆形,插件,红光,湖北匡通电子有限公司,3BB4HC", Part Name=发光二极管, ID=6, Part Number=101040102-0001, SMD/DIP=DIP
D4 D6 D7: library part 101040101-0014, Part Name=贴片肖特基, ID=24, Part Number=101040101-0014
D5: library part 101040101-0014, "B340,SMA,3 A,0.7 V,28 V,DIODES,B340A-13-F", Part Name=贴片肖特基, ID=7, Part Number=101040101-0014, SMD/DIP=SMD
J1: library part AD_WXHJ_PinHeader_02, "1*5 ，Φ1.0 ，2.54mm，直脚,无需焊接器件", Part Name=排针, ID=17, Part Number=AD_WXHJ_PinHeader_02, SMD/DIP=DIP
J2 J3: library part 1010902-0139, "DC2 2.54mm 2x10pin,2.54mm间距，2x10pin，32×8.55×27.5mm,母头,双排,双排牛角座", Part Name=DC牛角座, ID=4, Part Number=1010902-0139, SMD/DIP=DIP
JP1 JP2: library part 1010904-0015, "KF129-2P,螺丝紧固,2,ABS,松涛", Part Name=接线端子, ID=7, Part Number=1010904-0015, SMD/DIP=DIP
L1 L2 L3 L4: library part 1010302-0007, "47uH/2.2A,±20%，0.072Ω，L1200X1200X600", Part Name=贴片电感, ID=3, Part Number=1010302-0007
MARK1 MARK2: "MARK点", Part Number=AD_WXHJ_MARK_01, ID=8, Part Name=MARK点, SMD/DIP=SMD
P1 P4 P5: library part AD_WXHJ_PinHeader_01, "1*4 ，Φ1.0 ，2.54mm，直脚,无需焊接器件", Part Name=排针, ID=16, Part Number=AD_WXHJ_PinHeader_01, SMD/DIP=DIP
P2: "Header, 4-Pin, Dual row"
P3: library part AD_WXHJ_PinHeader_01, "1*3 ，Φ1.0 ，2.54mm，直脚,无需焊接器件", Part Name=排针, ID=16, Part Number=AD_WXHJ_PinHeader_01, SMD/DIP=DIP
P6: library part AD_WXHJ_PinHeader_01, "1*2 ，Φ1.0 ，2.54mm，直脚,无需焊接器件", Part Name=排针, ID=16, Part Number=AD_WXHJ_PinHeader_01, SMD/DIP=DIP
P7: library part 1010902-0121, "1.25-6AWR 卷,6针1.25mm,母头,单排,贴片卧式", Part Name=插座, ID=32, Part Number=1010902-0121, SMD/DIP=SMD
Q1 Q2 Q3 Q7 Q20: library part 101040201-0001, "9012,PNP,SOT-23,JCET;长电,S9012", Part Name=贴片三极管, ID=17, Part Number=101040201-0001, SMD/DIP=SMD
Q4 Q5 Q6 Q8 Q9 Q11 Q13 Q14 Q15 Q18 Q19 Q21: library part 101040201-0002, "9013,NPN,SOT-23,长电,S9013", Part Name=贴片三极管, ID=15, Part Number=101040201-0002, SMD/DIP=SMD
Q10 Q12: library part 101040201-0010, "RZR040P01TL；1.5v导通,P-MOS,SOT-23,罗姆,RZR040P01TL", Part Name=PMOS管, ID=18, Part Number=101040201-0010, SMD/DIP=SMD
Q16 Q17: library part 101040201-0013, "UT3401ZG,P-MOS,SOT-23,UTC,UT3401ZG", Part Name=功率MOS管, ID=19, Part Number=101040201-0013, SMD/DIP=SMD
R1 R2 R3 R4 R5 R6 R73 R74 R88 R94 R95: library part 101010103-0005, "国巨,±5%,0603,,155 ℃,-55 ℃,RC0603JR-07100KL,无铅,100 ppm/℃,1/10W,,100K", Part Name=0603贴片电阻, ID=3, Part Number=101010103-0005, SMD/DIP=SMD
R7 R8 R9 R96: library part 101010103-0052, "10K±1%,1/10W,0603", Part Name=0603贴片电阻, ID=6, Part Number=101010103-0052, SMD/DIP=SMD
R10 R18 R24 R85: library part 101010103-0004, "国巨,±5%,0603,,155 ℃,-55 ℃,RC0603JR-0720KL,无铅,200 ppm/℃,1/10W,,20K", Part Name=0603贴片电阻, ID=15, Part Number=101010103-0004, SMD/DIP=SMD
R11 R12 R13 R22 R23 R25 R26 R37 R42 R43 R46 R56 R72 R76 R83 R84 R86 R89 R97: library part 101010103-0003, "国巨,±5%,0603,,155 ℃,-55 ℃,RC0603JR-0710KL,无铅,200 ppm/℃,1/10W,,10K", Part Name=0603贴片电阻, ID=7, Part Number=101010103-0003, SMD/DIP=SMD
R14 R15 R16 R32 R59 R68 R70 R71 R75 R81 R92 R93 R98: library part 101010103-0008, "1K,±5%,1/10W,0603,国巨,RC0603JR-071KL", Part Name=0603贴片电阻, Part Number=101010103-0008, SMD/DIP=SMD
  R14 R15 R16 R32 R59 R70 R71 R75 R81 R92 R93 R98: ID=10
  R68: ID=9
R17 R36: library part 101010103-0022, "100R,±5%,1/10W,0603,国巨,RC0603JR-07100RL", Part Name=0603贴片电阻, ID=5, Part Number=101010103-0022, SMD/DIP=SMD
R19: library part 101010103-0006, "国巨,±5%,0603,,155 ℃,-55 ℃,RC0603JR-073KL,无铅,100 ppm/℃,1/10W,,3K", Part Name=0603贴片电阻, ID=23, Part Number=101010103-0006, SMD/DIP=SMD
R20 R21 R80 R87: library part 101010103-0005, "100K±5%,1/10W,0603", Part Name=0603贴片电阻, ID=30, Part Number=101010103-0005
R27 R33 R35 R54 R60 R64: library part 101010103-0017, "10R,±5%,1/10W,0603,国巨,RC0603JR-0710RL", Part Name=0603贴片电阻, ID=8, Part Number=101010103-0017, SMD/DIP=SMD
R28 R55 R90 R91: library part 101010103-0034, "200K,±5%,1/10W,0603,国巨,RC0603JR-07200KL", Part Name=0603贴片电阻, ID=13, Part Number=101010103-0034, SMD/DIP=SMD
R29: library part 101010103-0012, "47K,±5%,1/10W,0603,国巨,RC0603JR-0747KL", Part Name=0603贴片电阻, ID=26, Part Number=101010103-0012, SMD/DIP=SMD
R30 R31 R38 R39 R40 R41 R44 R45 R47 R48 R49 R50 R51 R52 R58 R61 R62 R65 R66: library part 101010103-0001, "国巨,±5%,0603,,155 ℃,-55 ℃,RC0603J2-070RL,无铅,200 ppm/℃,1/10W,,0R", Part Name=0603贴片电阻, ID=1, Part Number=101010103-0001, SMD/DIP=SMD
R34 R53 R57 R63: library part 101010103-0025, "国巨,±5%,0603,,155 ℃,-55 ℃,RC0603JR-072ML,含铅,100 ppm/℃,1/10W,,2M", Part Name=0603贴片电阻, ID=20, Part Number=101010103-0025, SMD/DIP=SMD
R67 R69: library part 101010103-0009, "国巨,±5%,0603,,155 ℃,-55 ℃,RC0603JR-0722RL,无铅,200 ppm/℃,1/10W,,22欧", Part Name=0603贴片电阻, ID=18, Part Number=101010103-0009, SMD/DIP=SMD
R77: library part 101010103-0015, "国巨,±5%,0603,,155 ℃,55 ℃,RC0603JR-075.1KL,无铅,200 ppm/℃,1/10W,,5.1k", Part Name=0603贴片电阻, ID=27, Part Number=101010103-0015, SMD/DIP=SMD
R78: library part 101010103-056, "25K±1%,1/10W,0603", Part Name=0603贴片电阻, Part Number=101010103-0056, ID=10, SMD/DIP=SMD
R79: library part 101010103-0013, "1.5K,±5%,1/10W,0603,国巨,RC0603JR-071K5L", Part Name=0603贴片电阻, ID=10, Part Number=101010103-0013, SMD/DIP=SMD
R82: library part 101010103-0042, "4.7K±5%,1/10W,0603", Part Name=0603贴片电阻, ID=24, Part Number=101010103-0042, SMD/DIP=SMD
U2: "101050101-0261"
U4 U5 U6 U7: library part 101050101-0053, "TPS5430DDA,SOP8,TI,TPS5430DDA", Part Name=电源芯片, ID=9, Part Number=101050101-0053, SMD/DIP=SMD
U8: library part 1010503-0029, "CE6232-3.3,CE6232-3.3,SOT89-3,8V,1.8V,0.11V,3.3V,300mA,0.8uA,南京芯力微电子有限公司", Part Name=线性稳压芯片, ID=5, Part Number=1010503-0029, SMD/DIP=SMD
Y1: library part 1010601-0009, Part Name=贴片晶振, Part Number=1010601-0020, ID=20, SMD/DIP=SMD

## Via types
v1: diameter 0.5, hole 0.3, Top Layer to Bottom Layer, tented both sides, 290 vias
v2: diameter 0.813, hole 0.406, Top Layer to Bottom Layer, 12 vias

## Nets (pads, with @x,y where several pads share a name; then routed paths per layer and width w, separated by ;. In a path a pad name is that pad's centre, name@x,y a point inside that pad or via, vN(x,y) a via of type N, cw(c..) or ccw(c..) an arc to the next point about the centre after c; other vN are vias at no path point)
3.3V: C2.2 C7.2 C10.2 C23.1 C25.1 C27.1 D3.1 J1.5 P1.1 P1.4 R10.1 R18.2 R22.1 R23.1 R37.1 R42.1 R43.1 R46.1 R88.1 U1.5 U2.64 U2.66 U3.5 U8.3 | length 26.5
  Top Layer w0.254: v1(7.652,105.124) R18.2@7.652,106.172 ; v1(7.912,109.385) R10.1@9.036,109.385 ; U3.5@21.463,52.07 C7.2@21.463,53.467 v1(21.463,54.483) ; R42.1@27.051,55.499 v1(27.051,56.388) ; R46.1@28.575,55.499 v1(28.575,56.388) ; v1(35.104,75.998) U2.64@36.445,75.998 37.517,75.998 38.1,76.581 38.1,77.343 ; U2.66@36.445,76.998 37.755,76.998 38.1,77.343 ; C10.2@39.205,77.851 38.354,77.851 38.1,77.597 38.1,77.343 ; U1.5@50.927,52.07 C2.2@50.927,53.467 v1(50.927,54.356) ; R37.1@52.908,86.995 52.908,87.833 v1(53.213,88.138) ; R43.1@53.035,89.535 53.035,90.373 v1(53.34,90.678) ; R88.1@54.737,62.103 v1(55.753,62.103) ; v1(55.194,55.423) R22.1@56.134,55.423 ; R23.1@58.293,55.423 v1(58.293,56.515)
  Top Layer w0.508: U8.3@33.38,49.506 C23.1@33.38,51.308 C25.1@33.38,52.895 C27.1@33.38,54.483
  other v1: 34.925,55.118 33.147,56.007 34.036,56.007 34.925,56.007
3.6V_I_CHK_CTL: R59.2 U2.15 | length 45.3
  Top Layer w0.254: R59.2@11.669,56.515 11.669,64.247 12.283,64.861 v1(27.849,64.861) ; U2.15@27.595,85.848 27.595,84.491 v1(27.849,84.237)
  Bottom Layer w0.254: v1(27.849,64.861) v1(27.849,84.237)
7.2V_I_CHK_CTL: R32.2 U2.16 | length 43.2
  Top Layer w0.254: v1(27.095,83.903) U2.16@27.095,85.848 ; R32.2@41.133,56.515 v1(41.133,57.77)
  Bottom Layer w0.254: v1(27.095,83.903) 27.095,58.122 27.447,57.77 v1(41.133,57.77)
12V: C13.1 L1.2 Q16.2 Q17.2 R53.1 R57.1 R73.2 | length 5.2
  Top Layer w0.254: v1(1.651,50.292) R57.1@1.651,51.308 ; v1(3.998,53.914) Q17.2@3.998,55.004 ; Q16.2@6.284,51.124 v1(6.284,52.263) ; R53.1@6.35,57.023 v1(8.351,57.023)
  other v1: 1.143,23.622 1.778,23.622 1.143,24.257 1.778,24.257 1.905,43.053 2.921,43.053 1.905,44.196 2.921,44.196 3.937,44.196 1.905,45.212 2.921,45.212 3.937,45.212
12V_CTL: R70.1 U2.32 | length 78.4
  Top Layer w0.254: R70.1@14.605,8.118 15.113,8.626 v1(15.113,40.894) ; v1(19.189,78.498) U2.32@23.245,78.498
  Bottom Layer w0.254: v1(15.113,40.894) 18.669,40.894 19.189,41.414 v1(19.189,78.498)
12V_CTL1: R93.1 U2.41 | length 4.9
  Top Layer w0.254: R93.1@20.752,73.533 20.879,73.406 23.876,73.406 24.003,73.279 24.003,72.898 24.253,72.648 U2.41@25.095,72.648
12V_CTL2: R92.1 U2.42 | length 6.5
  Top Layer w0.254: R92.1@20.752,71.628 21.006,71.374 22.679,71.374 23.045,71.74 24.313,71.74 24.679,71.374 25.527,71.374 25.595,71.442 U2.42@25.595,72.648
12V_Out1: D9.2 J3.17 J3.19 | length 10.8
  Top Layer w0.762: J3.17@3.048,72.898 J3.19@3.048,70.358 3.048,65.786 3.302,65.532 D9.2@3.302,62.23
12V_Out2: D8.2 J3.18 J3.20 | length 10.8
  Top Layer w0.762: J3.18@5.588,72.898 J3.20@5.588,70.358 5.588,64.643 5.969,64.262 D8.2@5.969,62.23
119: R41.2 U2.37 | length 25.7
  Top Layer w0.254: R41.2@11.405,90.931 16.003,90.931 16.891,90.043 16.891,76.962 17.855,75.998 U2.37@23.245,75.998
AD1: J2.3 Q1.2 R1.2 | length 67.1
  Top Layer w0.254: J2.3@28.448,116.427 28.956,115.919 28.956,102.489 29.591,101.854 v1(50.546,101.854) ; R1.2@46.99,73.901 46.99,75.18 Q1.2@47.178,75.368 v1(48.444,75.368)
  Bottom Layer w0.254: v1(48.444,75.368) 50.095,75.368 50.546,75.819 v1(50.546,101.854)
AD1_CHK: R3.2 R11.1 U2.73 | length 9.7
  Top Layer w0.254: U2.73@36.445,80.498 43.541,80.498 43.802,80.759 R11.1@44.526,80.759 R3.2@44.526,79.235
AD1_CTL: R14.1 U2.49 | length 30.1
  Top Layer w0.254: v1(28.702,62.611) 29.095,63.004 U2.49@29.095,72.648 ; v1(34.544,62.611) 44.196,62.611 44.577,62.992 R14.1@44.577,66.878
  Bottom Layer w0.254: v1(28.702,62.611) v1(34.544,62.611)
AD2: J2.5 Q2.2 R2.2 | length 65.4
  Top Layer w0.254: J2.5@30.988,116.427 30.988,103.886 31.75,103.124 v1(51.562,103.124) ; R2.2@52.197,73.901 52.197,75.307 Q2.2@52.258,75.368 v1(53.41,75.368)
  Bottom Layer w0.254: v1(51.562,103.124) 51.562,75.819 52.013,75.368 v1(53.41,75.368)
AD2_CHK: R4.2 R12.1 U2.74 | length 15.7
  Top Layer w0.254: U2.74@36.445,80.998 41.882,80.998 42.545,81.661 49.403,81.661 49.606,81.458 R12.1@49.606,80.759 R4.2@49.606,79.235
AD2_CTL: R15.1 U2.50 | length 36.3
  Top Layer w0.254: v1(29.21,61.849) 29.595,62.234 U2.50@29.595,72.648 ; v1(33.909,61.849) 49.276,61.849 49.784,62.357 R15.1@49.784,66.878
  Bottom Layer w0.254: v1(29.21,61.849) v1(33.909,61.849)
AD3: J2.7 Q3.2 R5.2 | length 66.9
  Top Layer w0.254: J2.7@33.528,116.427 33.528,105.41 34.544,104.394 v1(52.451,104.394) ; R5.2@57.404,73.901 57.404,75.307 Q3.2@57.465,75.368 v1(58.236,75.368)
  Bottom Layer w0.254: v1(52.451,104.394) 52.451,77.089 52.959,76.581 57.912,76.581 58.236,76.257 v1(58.236,75.368)
AD3_CHK: R6.2 R13.1 U2.75 | length 21.6
  Top Layer w0.254: U2.75@36.445,81.498 41.239,81.498 42.037,82.296 54.61,82.296 54.813,82.093 R13.1@54.813,80.759 R6.2@54.813,79.235
AD3_CTL: R16.1 U2.51 | length 42
  Top Layer w0.254: v1(29.591,61.087) 30.095,61.591 U2.51@30.095,72.648 ; v1(33.274,61.087) 50.546,61.087 51.435,61.976 51.435,66.167 52.146,66.878 R16.1@54.991,66.878
  Bottom Layer w0.254: v1(29.591,61.087) v1(33.274,61.087)
AD4: Q20.2 R48.2 R94.2 | length 42.2
  Top Layer w0.254: R48.2@11.354,82.902 14.253,82.902 14.478,82.677 14.478,68.961 14.605,68.834 v1(16.637,68.834) ; R94.2@16.713,59.309 16.637,59.233 v1(16.637,57.277) 16.637,55.753 16.891,55.499 22.86,55.499 23.048,55.687 Q20.2@23.048,56.966
  Bottom Layer w0.254: v1(16.637,57.277) v1(16.637,68.834)
AD4_CHK: R95.2 R97.1 U2.57 | length 24.6
  Top Layer w0.254: R95.2@22.987,62.611 R97.1@22.987,60.96 v1(27.813,60.96) ; U2.57@33.095,72.648 33.095,67.997 34.417,66.675 v1(34.417,63.754)
  Bottom Layer w0.254: v1(27.813,60.96) 27.813,62.611 28.528,63.326 28.551,63.326 28.979,63.754 v1(34.417,63.754)
AD4_CTL: R98.1 U2.48 | length 29.4
  Top Layer w0.254: R98.1@9.906,61.519 9.906,65.278 10.033,65.405 27.608,65.405 27.619,65.416 28.078,65.416 28.595,65.933 U2.48@28.595,72.648
ADC_MOTO_B: R21.1 R25.2 U2.76 | length 12.6
  Top Layer w0.254: U2.76@36.445,81.998 40.85,81.998 41.91,83.058 R25.2@47.092,83.058 47.117,83.083 R21.1@47.117,84.565
ADC_MOTO_R: R20.1 R26.2 U2.77 | length 9.4
  Top Layer w0.254: U2.77@36.445,82.498 40.461,82.498 41.91,83.947 R26.2@43.663,83.947 43.688,83.972 R20.1@43.688,85.471
CARD_BSL: J2.4 P7.1 | length 41.5
  Top Layer w0.254: J2.4@28.448,118.967 29.718,117.697 29.718,103.251 30.455,102.514 P7.1@54.684,102.514
CARD_POW: J2.12 P7.6 | length 25
  Top Layer w0.254: J2.12@38.608,118.967 39.878,117.697 39.878,109.728 40.842,108.764 P7.6@54.684,108.764
CARD_RST: J2.10 P7.4 | length 30
  Top Layer w0.254: J2.10@36.068,118.967 37.338,117.697 37.338,107.188 38.262,106.264 P7.4@54.684,106.264
CARD_SCLK: J2.8 P7.3 | length 33.9
  Top Layer w0.254: J2.8@33.528,118.967 34.798,117.697 34.798,105.791 35.575,105.014 P7.3@54.684,105.014
CARD_SDA: J2.6 P7.2 | length 37.6
  Top Layer w0.254: J2.6@30.988,118.967 32.131,117.824 32.131,104.775 33.142,103.764 P7.2@54.684,103.764
DAC_OUT: R77.1 U2.33 | length 84.5
  Top Layer w0.254: U2.33@23.245,77.998 23.265,77.978 v1(25.019,77.978) ; v1(45.72,17.018) R77.1@45.72,18.948
  Bottom Layer w0.254: v1(25.019,77.978) 25.019,41.58 25.273,41.326 29.746,41.326 29.869,41.449 30.329,41.449 30.503,41.275 43.561,41.275 43.895,40.941 43.895,18.081 44.958,17.018 v1(45.72,17.018)
DW_CHEAK: R45.2 U2.39 | length 22.4
  Top Layer w0.254: R45.2@11.405,86.916 15.016,86.916 15.875,86.058 15.875,76.454 17.331,74.998 U2.39@23.245,74.998
GND: C1.2 C2.1 C3.2 C5.2 C6.1 C7.1 C8.2 C10.1 C12.2 C13.2 C15.2 C16.2 C18.2 C19.2 C21.2 C22.2 C23.2 C24.2 C25.2 C26.2 C27.2 D4.1 D5.1 D6.1 D7.1 J1.4 J2.2 J3.1 J3.3 JP1.2 JP2.2 P2.2 P2.4 P2.6 P2.8 P3.3 P4.1 P5.1 P6.1 P7.5 Q4.2 Q5.2 Q6.2 Q7.3 Q8.2 Q9.2 Q11.2 Q13.2 Q14.2 Q15.2 Q18.2 Q19.2 Q21.2 R11.2 R12.2 R13.2 R25.1 R26.1 R29.1 R56.1 R71.1 R76.1 R82.1 R84.1 R85.1 R89.1 R97.2 U1.1 U1.2 U1.6 U2.63 U2.65 U3.1 U3.2 U3.6 U4.6 U4.9 U5.6 U5.9 U6.6 U6.9 U7.6 U7.9 U8.1 | length 16.1
  Top Layer w0.254: v1(33.655,70.866) v1(33.655,68.707) 33.95,68.412 C6.1@34.595,68.412 v1(37.424,68.412) v1(40.564,71.552) C5.2@40.564,74.498 40.564,75.006 v1(40.132,75.438) v1(38.608,75.438)
  other v1: 41.656,3.175 38.1,3.429 32.512,3.81 17.653,4.191 28.956,4.953 35.433,5.715 38.354,6.731 41.148,6.731 44.704,7.747 33.02,8.382 17.272,10.668 10.922,11.303 12.065,11.303 13.462,11.303 54.483,11.43 26.035,11.811 27.432,11.811 28.829,11.811 40.513,11.938 41.656,11.938 43.053,11.938 2.794,12.065 56.769,12.192 58.039,12.192 5.715,13.081 35.433,13.081 50.038,13.081 20.701,13.208 54.864,13.208 47.498,16.51 3.556,17.907 33.528,17.907 16.002,20.193 8.636,30.607 21.209,31.369 24.765,31.369 28.702,31.369 34.798,31.369 38.1,31.369 41.91,31.369 45.974,31.369 50.546,31.369 54.356,31.369 8.636,33.401 10.922,44.196 12.446,44.196 13.97,44.196 26.825,44.196 28.349,44.196 39.68,44.196 41.204,44.196 42.728,44.196 54.06,44.196 55.584,44.196 57.108,44.196 47.117,44.323 33.528,44.577 10.922,45.466 12.446,45.466 13.97,45.466 26.825,45.466 28.349,45.466 34.29,45.466 39.68,45.466 41.204,45.466 42.728,45.466 54.06,45.466 55.584,45.466 57.108,45.466 58.293,48.26 58.293,49.53 52.959,50.8 30.48,51.308 30.48,52.959 18.415,53.34 47.879,53.467 31.623,55.499 36.449,55.499 27.94,57.023 50.038,57.15 54.483,57.658 52.07,61.214 38.1,64.516 47.879,67.437 58.42,67.437 4.318,67.818 36.195,68.412 38.354,69.342 10.541,69.85 53.721,69.85 39.497,70.485 35.56,71.12 10.541,71.882 36.322,71.882 16.637,72.644 37.084,72.644 40.564,72.771 37.846,73.406 10.541,73.914 33.147,75.057 30.226,75.438 10.541,75.819 41.656,76.962 10.541,77.851 30.48,77.978 33.655,77.978 41.656,78.232 10.541,79.883 19.177,79.883 47.117,80.772 53.213,80.772 57.531,80.772 10.541,81.915 49.911,83.693 10.541,83.947 46.228,83.947 10.541,85.852 35.433,87.376 10.541,87.884 28.956,88.138 10.541,89.916 27.813,90.678 10.541,91.948 27.813,92.71 32.385,92.837 54.61,93.599 10.541,93.853 27.813,95.504 10.541,95.885 27.813,98.679 5.08,98.933 12.192,100.838 3.683,102.87 25.781,102.997 32.131,103.886 13.081,106.172 30.353,106.299 32.893,106.299 34.163,106.426 1.143,107.061 52.832,107.442 5.842,109.855 41.148,110.236 9.271,110.744 19.177,112.268 56.134,114.554 19.177,116.713 56.134,119.126 19.177,119.634
  other v2: 5.156,17.726 6.426,17.726 7.696,17.726 20.185,17.726 21.455,17.726 22.725,17.726 34.874,17.726 36.144,17.726 37.414,17.726 49.437,17.726 50.707,17.726 51.977,17.726
gongwei1: P2.1 U2.29 | length 52.9
  Top Layer w0.254: P2.1@5.969,118.237 5.969,116.205 6.477,115.697 13.335,115.697 13.716,115.316 13.716,100.457 14.732,99.441 17.78,99.441 18.923,98.298 18.923,81.407 20.332,79.998 U2.29@23.245,79.998
gongwei2: P2.3 U2.28 | length 50.1
  Top Layer w0.254: P2.3@8.509,118.237 8.509,116.586 8.89,116.205 13.97,116.205 14.351,115.824 14.351,100.711 15.113,99.949 18.034,99.949 19.431,98.552 19.431,81.661 20.594,80.498 U2.28@23.245,80.498